# Altium PCB SENSEI_Base-Board.PcbDoc (part 3 of 10)
Units mm, origin at the board's own origin, x right, y up, seen from the top; angles counter-clockwise.
Board outline 51.6 x 28.1 mm, 8 copper layers (Top Sig/Pwr, GND1, Sig1, GND2, Sig2, Pwr, GND3, Bot Sig/Pwr), stack 1.53 mm thick; 209 components, 201 nets, 1031 pads, 2222 vias.
Unrouted connection lines stored in the file: 214.
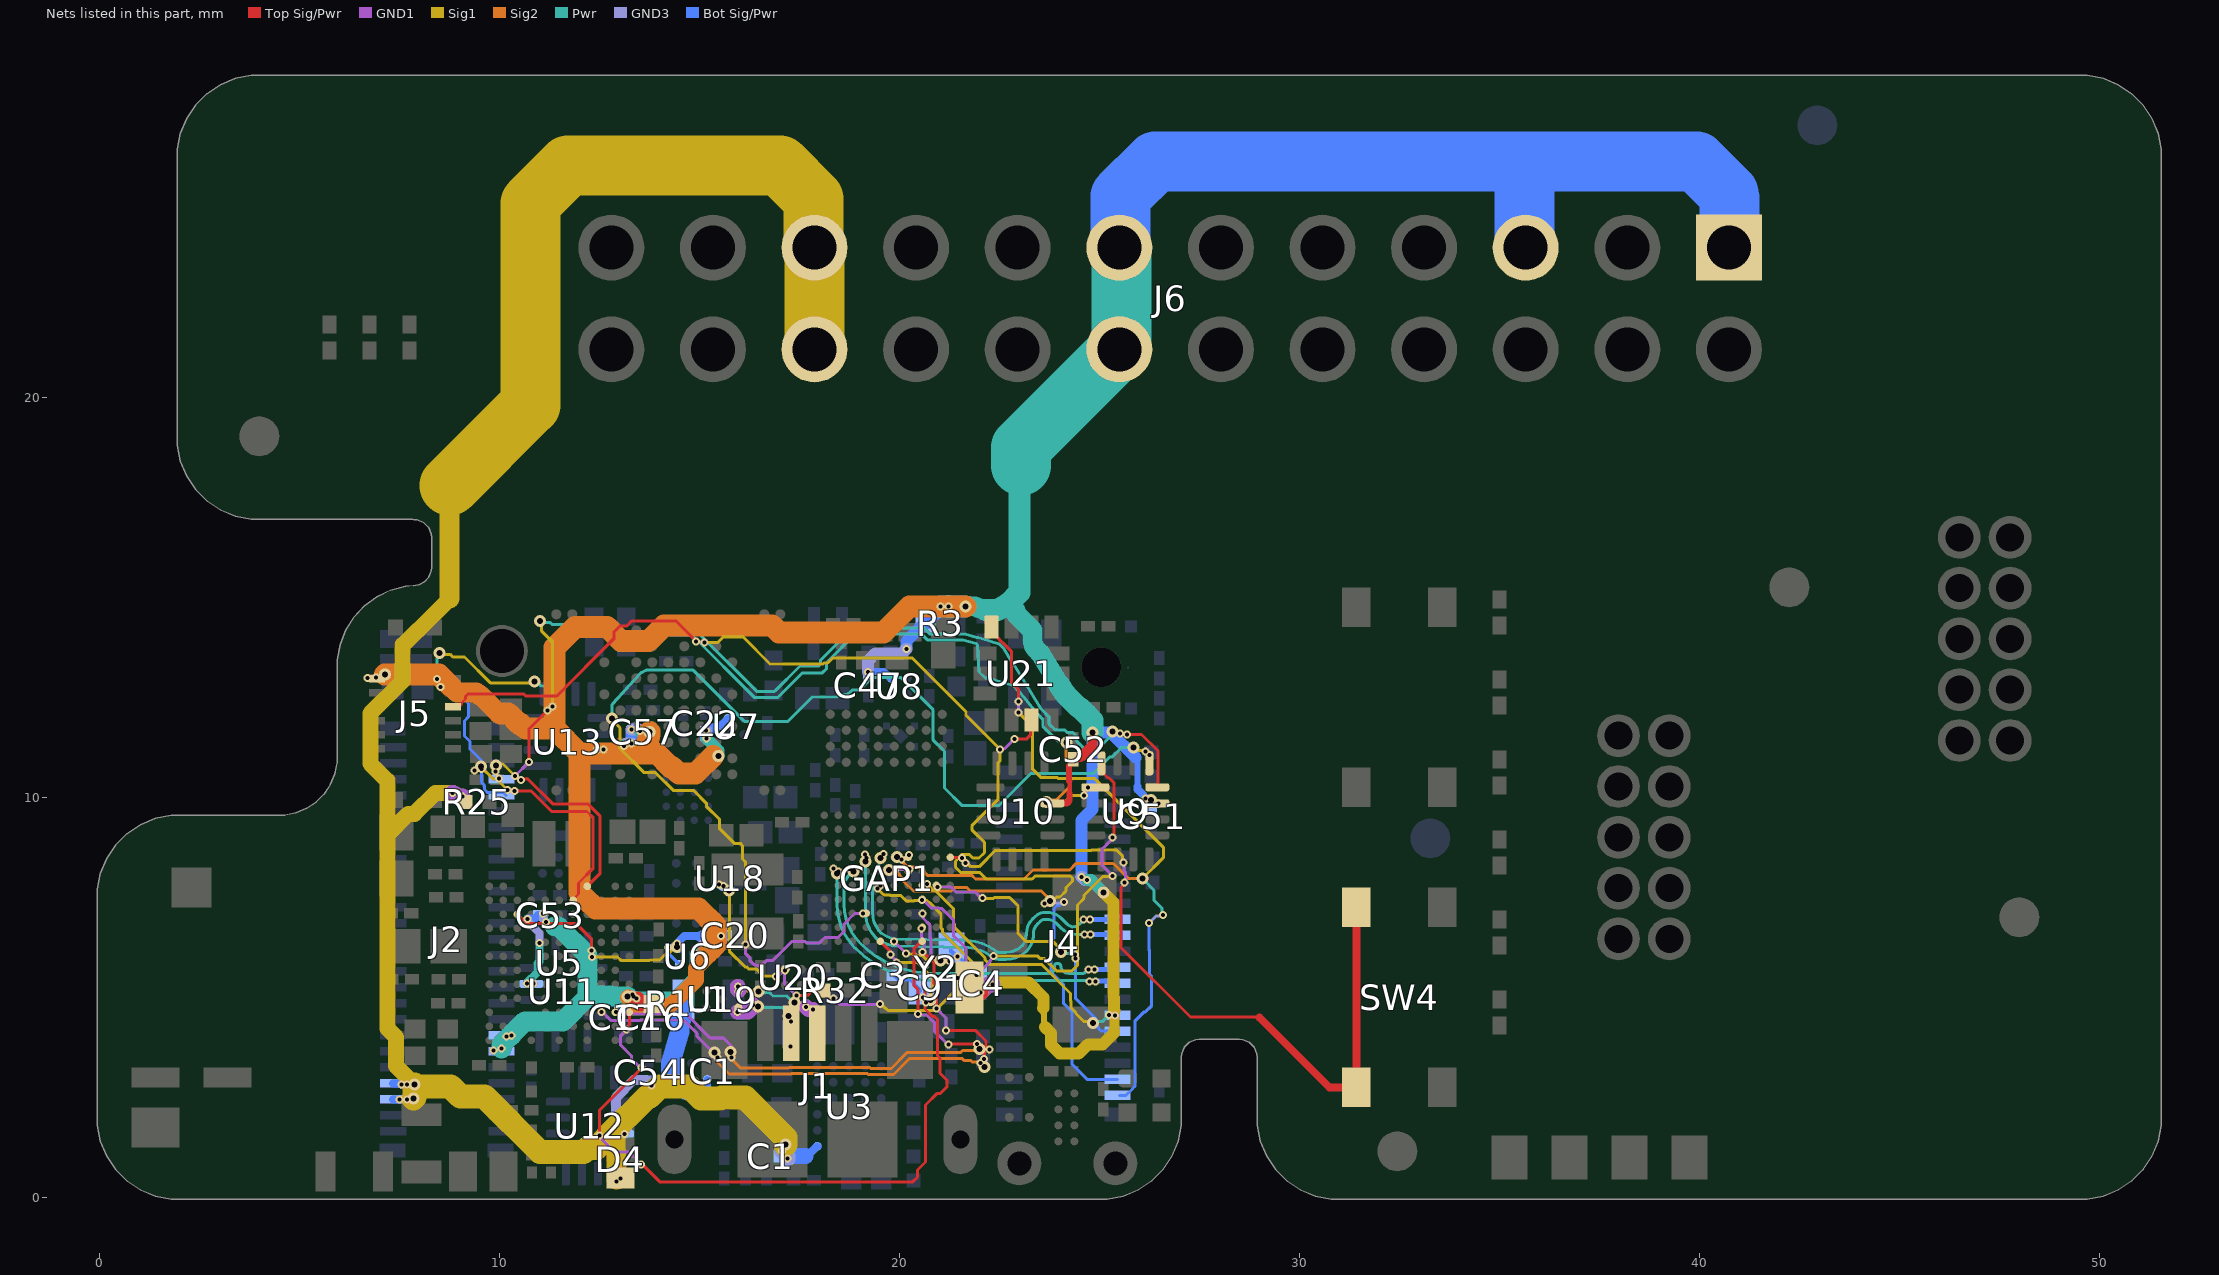
[diagram p8: the nets of this part, all layers, seen from the top]

## Via types
v1: diameter 0.2, hole 0.1, Top Sig/Pwr to GND1, 544 vias
v2: diameter 0.2, hole 0.1, GND3 to Bot Sig/Pwr, 436 vias
v3: diameter 0.2, hole 0.1, GND1 to Sig1, 385 vias
v4: diameter 0.3, hole 0.15, Sig1 to Pwr, 293 vias
v5: diameter 0.3, hole 0.15, Top Sig/Pwr to Bot Sig/Pwr, tented both sides, 284 vias
v6: diameter 0.2, hole 0.1, Pwr to GND3, 280 vias

## Nets (pads, with @x,y where several pads share a name; then routed paths per layer and width w, separated by ;. In a path a pad name is that pad's centre, name@x,y a point inside that pad or via, vN(x,y) a via of type N, cw(c..) or ccw(c..) an arc to the next point about the centre after c; other vN are vias at no path point) (continued)
EXTUSB_P: (continued)
  Top Sig/Pwr w0.156: v1(15.964,5.271) 15.969,5.266 15.969,5.156 U19.A1@15.975,5.15 ; v1(17.845,4.696) 17.95,4.591 J1.3@17.95,4.1
  GND1 w0.381: v1(15.964,5.271) 15.964,5.199 v3(15.987,5.176) ; v3(17.665,4.761) 17.729,4.696 v1(17.845,4.696)
  Sig1 w0.079: v3(15.987,5.176) 16,5.163 16.464,5.163 v4(16.477,5.15) ; v4(17.385,4.875) 17.444,4.875 17.535,4.784 17.642,4.784 v3(17.665,4.761)
  Pwr w0.079: v4(16.477,5.15) 16.5,5.127 16.748,5.127 16.844,5.032 17.19,5.032 17.347,4.875 v4(17.385,4.875)
FAST_XTAL_A: C3.1 GAP1.E1 Y2.1 | length 3.5
  Top Sig/Pwr w0.075: GAP1.E1@19.525,6.4 19.761,6.164 19.761,6.099 v1(19.785,6.075)
  GND1 w0.075: v1(19.785,6.075) 19.785,6.045 19.925,5.905 v3(19.925,5.875)
  GND3 w0.075: v2(20.591,4.993) 20.591,4.969 20.664,4.896 v6(20.664,4.873)
  Sig1 w0.075: v3(19.925,5.875) 19.928,5.872 20.445,5.872 20.829,5.488 20.829,5.227 20.792,5.19 20.792,4.934 v4(20.785,4.927)
  Pwr w0.075: v6(20.664,4.873) 20.718,4.927 v4(20.785,4.927)
  Bot Sig/Pwr w0.075: C3.1@19.851,5.55 19.953,5.448 20.013,5.448 20.023,5.437 20.275,5.437 20.525,5.188 Y2.1@20.525,5.15
FAST_XTAL_B: C4.1 GAP1.F1 Y2.3 | length 3.2
  Top Sig/Pwr w0.075: v1(19.871,6.397) 19.872,6.397 GAP1.F1@19.875,6.4
  GND1 w0.075: v1(19.871,6.397) v3@20.172,6.097
  GND3 w0.075: v6(21.25,5.913) 21.372,6.001 21.426,6.001 v2(21.45,6.025)
  Sig1 w0.075: v3(20.172,6.097) 20.181,6.088 20.384,6.088 20.422,6.05 20.575,6.05 20.7,5.925 v4(21.025,5.925)
  Pwr w0.075: v4(21.025,5.925) 21.037,5.937 21.107,5.937 v6(21.25,5.913)
  Bot Sig/Pwr w0.075: Y2.3@21.425,6 21.275,6.15 21.275,6.2 v2(21.45,6.025) 21.488,5.987 21.513,5.987 21.588,5.913 21.588,5.887 21.879,5.596 22.054,5.596 C4.1@22.075,5.575
GAP9_pwr_sel: U5.C10 U6.B2 | length 5.8
  Top Sig/Pwr w0.075: U5.C10@10.45,7.075 10.685,6.84 11.923,6.84 12.309,6.453 v1(12.309,6.173)
  GND1 w0.075: v1(12.309,6.173) 12.316,6.166 12.316,6.015 v3(12.323,6.008)
  GND3 w0.075: v2(14.213,6.245) 14.247,6.245 14.336,6.335 14.428,6.335 v6(14.442,6.349)
  Sig1 w0.075: v3(12.323,6.008) 12.957,6.008 13.051,5.915 13.737,5.915 13.754,5.931 14.01,5.931 14.194,6.115 14.252,6.115 14.39,6.254 v4(14.442,6.254)
  Pwr w0.075: v4(14.442,6.254) v6(14.442,6.349)
  Bot Sig/Pwr w0.075: v2(14.213,6.245) 14.237,6.221 14.237,6.088 U6.B2@14.5,5.825 U6.B2@14.5,5.812
GAP_btn: GAP1.K7 SW4.1 SW4.2 | length 22
  Top Sig/Pwr w0.075: GAP1.K7@21.275,8.5 21.575,8.5 21.564,8.489 v1(21.564,8.484) ; v1(25.636,7.876) 25.636,7.842 25.543,7.749 25.543,6.242 27.278,4.507 29.012,4.507 30.751,2.769 31.406,2.769 SW4.1@31.425,2.75
  Top Sig/Pwr w0.2: 29,4.5 30.75,2.75 SW4.1@31.425,2.75 SW4.2@31.425,7.25
  GND1 w0.075: v1(21.564,8.484) 21.564,8.469 21.657,8.376 v3(21.657,8.361) ; v3(25.601,8.374) 25.619,8.356 25.619,8.162 25.657,8.124 25.657,7.897 v1(25.636,7.876)
  Sig1 w0.075: v3(21.657,8.361) 21.691,8.361 21.787,8.265 21.997,8.265 22.406,8.674 24.19,8.674 24.195,8.669 24.802,8.669 24.821,8.688 25.427,8.688 25.577,8.538 25.577,8.398 v3(25.601,8.374)
GAP_CSI2_pwr_sel: GAP1.H4 R32.2 U18.B2 U20.B2 | length 11.9
  Top Sig/Pwr w0.075: v1(17.141,5.676) 17.15,5.685 U20.B2@17.15,5.7 ; v1(17.428,5.039) 17.696,5.039 17.812,5.155 18.08,5.155 R32.2@18.1,5.175 ; R32.2@18.12,5.155 18.283,4.992 18.329,4.992 v1(18.353,4.968)
  GND1 w0.075: v3(16.913,5.52) 16.947,5.52 16.989,5.562 16.999,5.562 17.113,5.676 v1(17.141,5.676) ; v1@17.144,5.673 17.13,5.658 17.13,5.337 v1(17.428,5.039) ; v1@18.344,4.961 18.372,4.961 18.509,4.824 19.509,4.824 v3(19.513,4.828) ; v1(20.569,7.436) 20.59,7.436 20.797,7.23 20.997,7.23 21.011,7.215 21.068,7.215 21.352,6.932 21.352,6.545 21.667,6.23 21.667,5.695 v3(21.451,5.479)
  GND3 w0.075: v6(15.498,7.817) 15.568,7.817 v2(15.599,7.786)
  Sig1 w0.075: v4(15.746,7.671) 15.752,7.666 15.752,6.153 16.147,5.757 16.189,5.757 16.245,5.701 16.434,5.701 16.597,5.538 16.895,5.538 v3(16.913,5.52) ; v3(19.513,4.828) 19.547,4.828 19.649,4.725 19.663,4.725 19.724,4.665 20.894,4.665 21.451,5.221 v3(21.451,5.479)
  Pwr w0.075: v6(15.498,7.817) 15.532,7.817 15.634,7.714 15.703,7.714 v4(15.746,7.671)
  Bot Sig/Pwr w0.075: U18.B2@15.575,7.775 15.586,7.786 v2(15.599,7.786)
GAP_CTRL: GAP1.H3 U5.L3 | length 19.7
  Top Sig/Pwr w0.075: v1(12.5,1.55) 12.5,2.169 13.55,3.219 v1(13.55,3.248) ; v1(13.175,4.2) 13.175,4.234 13.25,4.309 U5.L3@13.25,4.625 ; v1(13.543,0.826) 13.573,0.826 14.011,0.388 20.338,0.388 20.454,0.504 20.454,0.681 20.656,0.882 20.656,2.305 20.949,2.599 21.031,2.599 21.188,2.756 21.188,2.932 21.019,3.101 21.019,3.474 20.954,3.539 20.954,4.451 20.888,4.517 20.834,4.517 20.644,4.706 v1(20.644,5.786)
  GND1 w0.075: v1(12.5,1.55) 12.5,1.518 12.89,1.129 13.241,1.129 v1(13.543,0.826) ; v1(13.175,4.2) 13.175,4.183 13.033,4.041 13.033,3.805 13.308,3.531 13.308,3.443 13.373,3.378 13.386,3.378 13.516,3.248 v1(13.55,3.248) ; v1(20.582,7.096) 20.606,7.072 20.606,6.968 20.762,6.812 20.762,6.501 20.787,6.475 20.787,5.944 20.644,5.8 v1(20.644,5.786)
GAP_GPIO46: GAP1.H5 J4.29 | length 7
  GND1 w0.075: v1(20.607,7.75) 20.607,7.752 20.687,7.832 v3(20.687,7.834)
  GND3 w0.075: v6(25.241,4.556) 25.248,4.549 25.391,4.549 v2(25.398,4.541)
  Sig1 w0.075: v3(20.687,7.834) 20.696,7.834 20.848,7.682 20.888,7.682 21.349,7.221 21.349,6.852 21.376,6.826 21.376,6.753 22.142,5.987 22.142,5.935 22.263,5.815 23.565,5.815 24.282,5.097 24.282,4.911 24.288,4.905 24.288,4.746 24.42,4.614 24.42,4.586 24.606,4.4 24.802,4.4 v4(24.845,4.357)
  Pwr w0.075: v4(24.845,4.357) 24.888,4.4 25.085,4.4 v6(25.241,4.556)
  Bot Sig/Pwr w0.075: J4.29@25.295,4.553 25.306,4.541 v2(25.398,4.541)
GAP_GPIO47: GAP1.J5 J4.31 | length 7.2
  GND1 w0.075: v1(20.953,7.763) 21.286,7.763 21.417,7.633 21.897,7.633 22.051,7.479 v3(22.085,7.479)
  GND3 w0.075: v6(24.389,6.074) 24.41,6.054 v2(24.41,5.975)
  Sig1 w0.075: v3@22.089,7.474 22.355,7.474 22.374,7.493 22.76,7.493 22.972,7.282 22.972,6.592 23.174,6.39 23.846,6.39 24.04,6.195 v4(24.04,6.135)
  Pwr w0.075: v4(24.04,6.135) 24.077,6.098 24.365,6.098 v6(24.389,6.074)
  Bot Sig/Pwr w0.075: v2(24.41,5.975) 24.41,4.971 24.922,4.459 24.922,4.286 25.049,4.16 25.445,4.16 J4.31@25.455,4.15
GAP_GPIO48: GAP1.G6 J4.37 J5.6 U21.3 | length 37.2
  Top Sig/Pwr w0.075: J5.6@8.718,12.286 9.012,12.286 9.056,12.329 9.056,12.358 9.155,12.457 9.155,12.514 9.221,12.58 10.614,12.58 10.66,12.534 11.436,12.534 12.863,13.96 12.863,14.127 13.024,14.288 13.19,14.288 13.315,14.413 14.403,14.413 v1(14.922,13.893) ; v1(22.881,11.462) 23.187,11.462 23.275,11.55 23.275,11.9 U21.3@23.3,11.925
  GND1 w0.075: v1(14.922,13.893) 14.935,13.88 15.119,13.88 v3(15.132,13.867) ; v3(19.898,8.182) 19.911,8.195 20.237,8.195 v1(20.251,8.209) ; v3(22.512,11.2) 22.536,11.224 22.643,11.224 v1(22.881,11.462)
  Sig2 w0.075: v4(19.745,8.185) 19.788,8.142 19.921,8.142 20.12,7.943 20.12,7.888 20.353,7.655 21.303,7.655 21.398,7.75 21.679,7.75 21.771,7.658 23.549,7.658 23.767,7.441 v4(23.767,7.403)
  GND3 w0.075: v6(23.626,7.349) 23.64,7.363 24.102,7.363 v2(24.115,7.377)
  Sig1 w0.075: v3(15.132,13.867) 15.461,13.867 15.606,14.012 16.093,14.012 16.77,13.335 18.094,13.335 18.118,13.36 18.209,13.36 18.329,13.479 20.329,13.479 21.673,12.135 21.673,12.045 22.512,11.206 v3(22.512,11.2) ; v4(19.745,8.185) 19.895,8.185 v3(19.898,8.182) ; v3@22.519,11.2 22.512,11.194 22.512,10.91 22.463,10.86 22.463,9.937 21.812,9.287 21.812,9.19 22.128,8.875 22.128,8.616 21.993,8.48 21.838,8.48 21.745,8.574 21.569,8.574 21.444,8.449 21.444,8.439 21.404,8.399 21.404,8.254 21.543,8.115 22.018,8.115 22.148,7.985 22.174,7.958 23.321,7.958 23.398,8.035 24.271,8.035 24.336,7.97 24.336,7.908 24.172,7.744 24.172,7.664 24.018,7.51 23.935,7.51 23.828,7.403 v4(23.767,7.403)
  Pwr w0.075: v6(23.626,7.349) 23.68,7.403 v4(23.767,7.403)
  Bot Sig/Pwr w0.075: v2(24.115,7.377) 24.082,7.377 24.002,7.297 23.948,7.297 23.869,7.219 23.869,6.489 23.788,6.407 23.788,5.629 24.11,5.307 24.11,4.847 24.322,4.635 24.322,3.32 24.692,2.95 J4.37@25.455,2.95
GAP_GPIO49_SAI0_WS: GAP1.G7 J4.39 U21.11 | length 22.4
  Top Sig/Pwr w0.075: U21.11@22.25,14.225 22.25,14.2 22.512,13.938 22.512,13.928 22.578,13.862 22.588,13.862 22.8,13.65 22.8,12.875 22.975,12.7 v1(22.975,12.4)
  GND1 w0.075: v3(20.056,8.444) 20.08,8.468 20.12,8.468 20.206,8.555 v1(20.24,8.555) ; v1(22.975,12.4) 22.98,12.395 22.98,12.12 v3(22.985,12.115)
  Sig2 w0.075: v4(19.948,8.508) 19.955,8.508 20.164,8.299 20.203,8.26 20.491,8.26 20.701,8.05 21.812,8.05 21.903,7.958 23.115,7.958 23.342,8.185 24.262,8.185 24.427,8.35 25.347,8.35 25.724,7.973 26.072,7.973 v4(26.077,7.967)
  GND3 w0.075: v2(26.244,6.853) 26.42,7.029 26.564,7.029 v6(26.588,7.053)
  Sig1 w0.075: v4(19.948,8.508) 19.992,8.508 v3(20.056,8.444) ; v3(22.985,12.115) 23.325,11.775 23.325,10.713 23.548,10.49 23.955,10.49 23.971,10.475 24.875,10.475 26.6,8.75 26.6,8.49 v4(26.077,7.967)
  Pwr w0.075: v4(26.077,7.967) 26.37,7.675 26.37,7.424 26.564,7.23 26.564,7.077 v6(26.588,7.053)
  Bot Sig/Pwr w0.075: J4.39@25.508,2.548 25.668,2.548 25.828,2.708 25.828,2.719 25.898,2.788 25.898,4.312 25.897,4.413 26.121,4.637 26.157,4.637 26.311,4.791 26.311,5.513 26.251,5.573 26.251,6.181 26.244,6.187 v2(26.244,6.853)